# EAGLE board Swissler_HW2-2 (EAGLE 8.1.0)
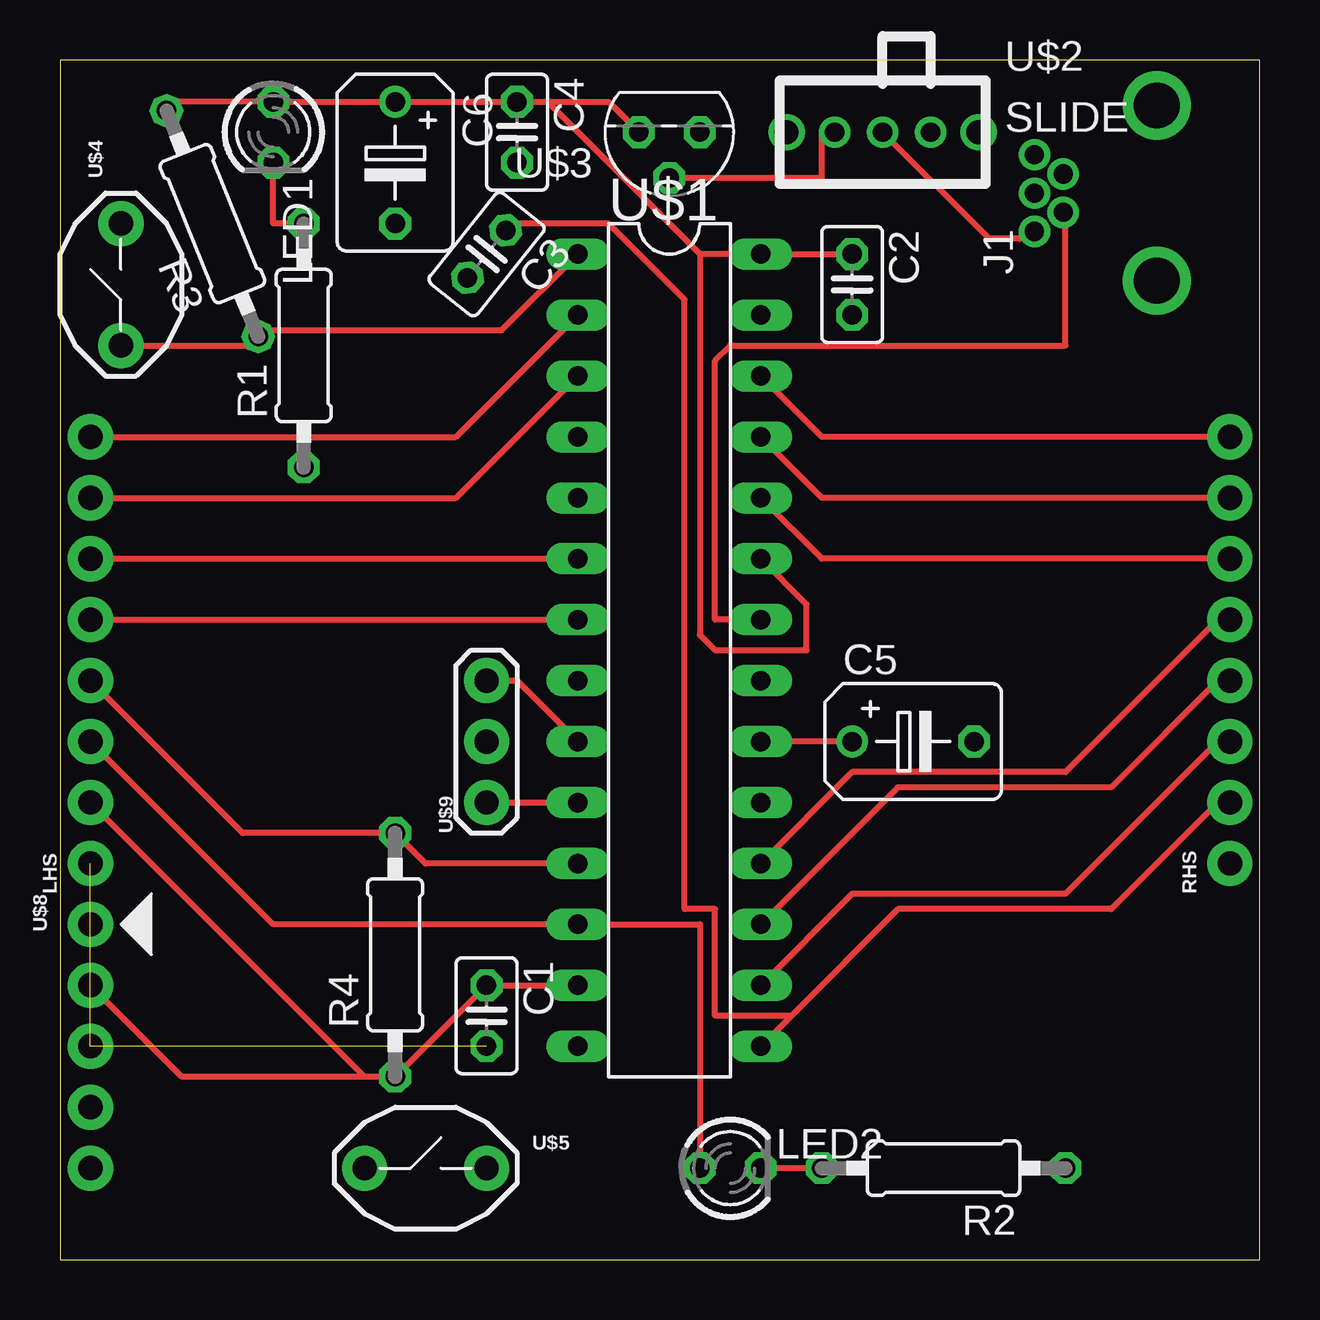
[diagram p0: board, top side]
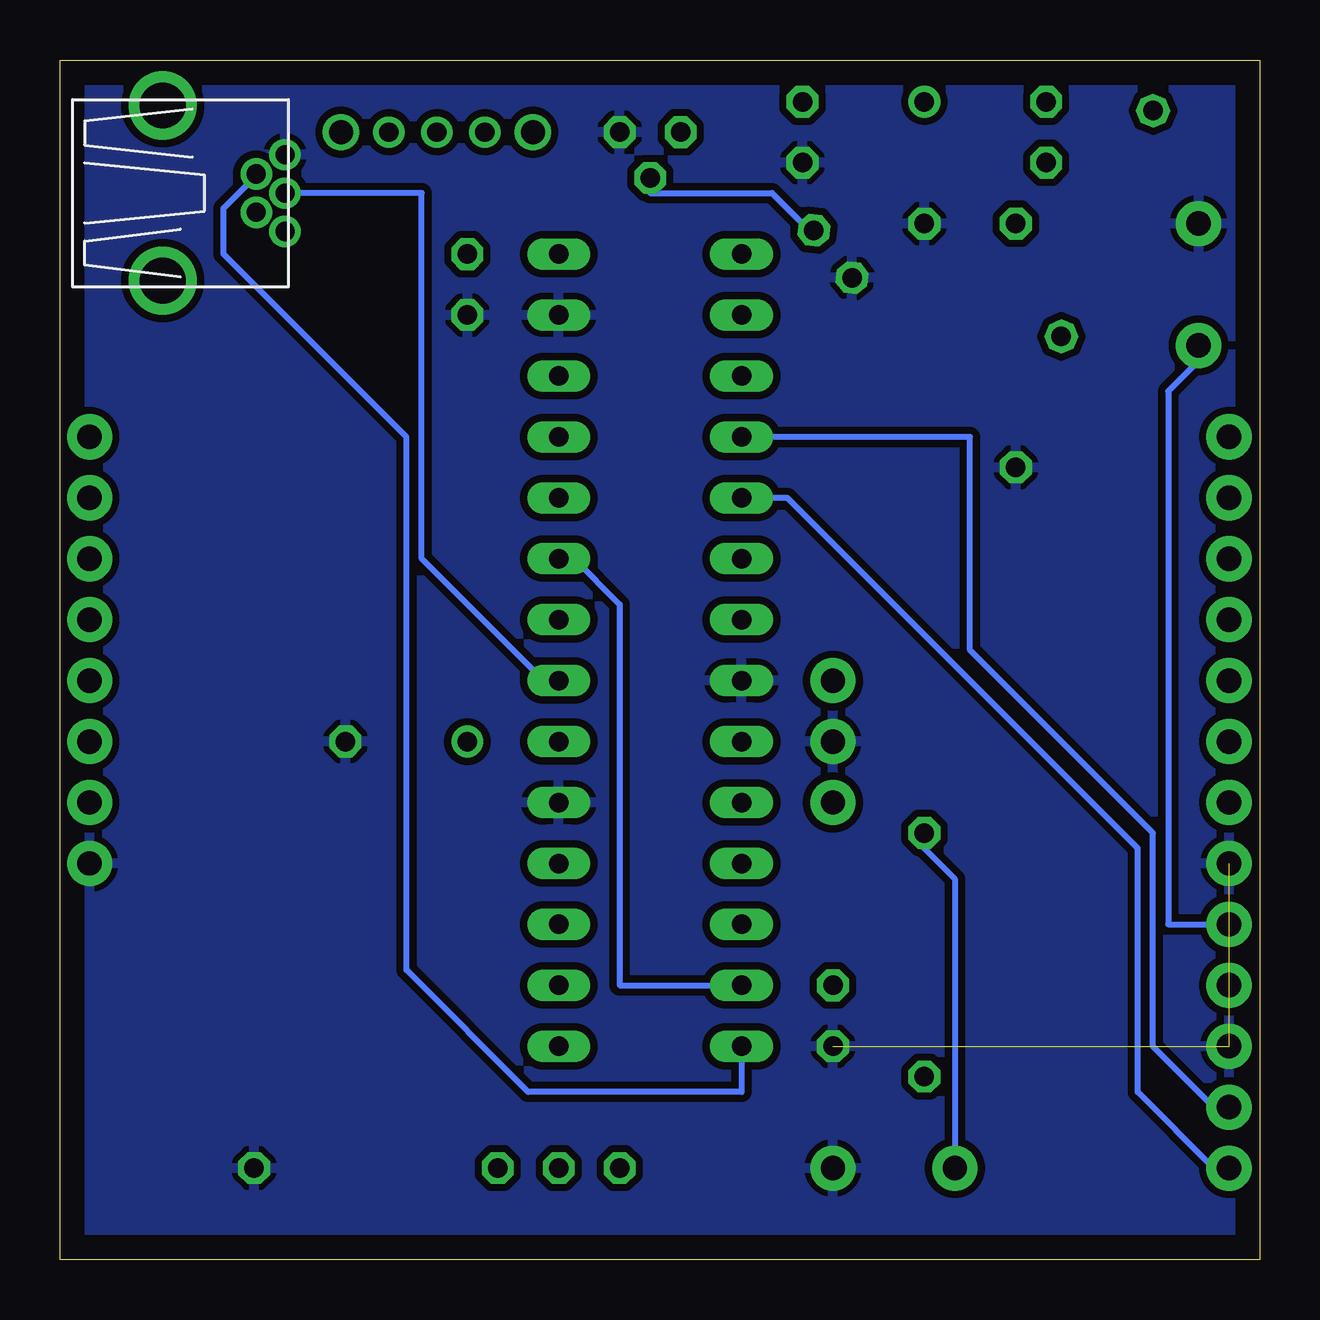
[diagram p1: board, bottom side, seen from below]

Size 50 x 50 mm. Coordinates in mm from the lower left corner, seen from the top.
Outline: 0,0 50,0 50,50 0,50 0,0
Copper layers (1*16): Top 0.035mm / dielectric 1.5mm / Bottom 0.035mm
Design rules "default": minimum track width 10mil, minimum drill 24mil, track to track 8mil, track to pad 8mil, pad to pad 8mil, via to via 8mil, smd to smd 8mil, copper to edge 40mil, drill to drill 8mil, minimum pad ring 10mil, minimum via ring 8mil, stop-mask expansion 4mil, vias tented up to drill 0mil, thermal gap 10mil

## Footprints (pad centres in the part's own frame; a part is rotated, then mirrored left to right if it is on the bottom)
C025-025X050 = drill 0.813 octagon: 1 -1.27,0; 2 1.27,0
B45181B = drill 0.813: + -2.54,0 | drill 0.813 octagon: - 2.54,0
USB-MB-H = drill 0.8: D+ 5.1,0; D- 3.9,0.8; GND 5.1,-1.6; ID 3.9,-0.8; VBUS 5.1,1.6 | drill 1.9: P$6 0,-3.65; P$7 0,3.65
LED3MM = drill 0.813 octagon: A -1.27,0; K 1.27,0
1X08 = drill 1.016 pad 1.88: 1 0,0; 2 2.54,0; 3 5.08,0; 4 7.62,0; 5 10.16,0; 6 12.7,0; 7 15.24,0; 8 17.78,0
0207/10 = drill 0.813 octagon: 1 -5.08,0; 2 5.08,0
DIL28-3 = drill 0.813 long: 1 -16.51,-3.81; 2 -13.97,-3.81; 3 -11.43,-3.81; 4 -8.89,-3.81; 5 -6.35,-3.81; 6 -3.81,-3.81; 7 -1.27,-3.81; 8 1.27,-3.81; 9 3.81,-3.81; 10 6.35,-3.81; 11 8.89,-3.81; 12 11.43,-3.81; 13 13.97,-3.81; 14 16.51,-3.81; 15 16.51,3.81; 16 13.97,3.81; 17 11.43,3.81; 18 8.89,3.81; 19 6.35,3.81; 20 3.81,3.81; 21 1.27,3.81; 22 -1.27,3.81; 23 -3.81,3.81; 24 -6.35,3.81; 25 -8.89,3.81; 26 -11.43,3.81; 27 -13.97,3.81; 28 -16.51,3.81
SLIDE = drill 0.8: 1 -2,0; 2 0,0; 3 2,0 | drill 1: P$1 -4,0; P$2 4,0
TO92 = drill 0.813 octagon: 1 -1.27,0; 2 0,1.905; 3 1.27,0
PB = drill 1.016 pad 1.88: 1 -2.54,0; 2 2.54,0
1X05 = drill 1.016 pad 1.88: 1 0,0; 2 2.54,0; 3 5.08,0; 4 7.62,0; 5 10.16,0
OSC = drill 1.016 pad 1.88: 1 -2.54,0; 2 0,0; 3 2.54,0

## Placement (x,y rotation side)
C1  0.1uF  [C025-025X050]  17.78,10.16 270 top
C2  0.1uF  [C025-025X050]  33.02,40.64 270 top
C3  0.1uF  [C025-025X050]  17.78,41.91 231.3 top
C4  0.1uF  [C025-025X050]  19.05,46.99 270 top
C5  10uF  [B45181B]  35.56,21.59 0 top
C6  10uF  [B45181B]  13.97,45.72 270 top
J1  USB-MB-H  [USB-MB-H]  45.72,44.45 180 top
LED1  RED  [LED3MM]  8.89,46.99 270 top
LED2  GREEN  [LED3MM]  27.94,3.81 0 top
LHS  CONN_08  [1X08]  1.27,16.51 90 top
R1  330  [0207/10]  10.16,38.1 90 top
R2  330  [0207/10]  36.83,3.81 180 top
R3  10k  [0207/10]  6.35,43.18 112.1 top
R4  10k  [0207/10]  13.97,12.7 90 top
RHS  CONN_08  [1X08]  48.77,16.51 90 top
U$1  PIC32MX250F128B  [DIL28-3]  25.4,25.4 270 top
U$2  SLIDE  [SLIDE]  34.29,46.99 0 top
U$3  MMCP1702  [TO92]  25.4,46.99 180 top
U$4  RESET  [PB]  2.54,40.64 90 top
U$5  USER  [PB]  15.24,3.81 0 top
U$8  PICKIT3  [1X05]  1.27,13.97 270 top
U$9  OSC  [OSC]  17.78,21.59 90 top

## Library data of the parts
C1-C6 J1 LHS R1-R4 RHS U$1-U$5 U$8 U$9 = Swissler_HW2
LED1 LED2 = led

## Nets
+3V3: C1.1 C2.1 C4.1 C6.+ LED1.A LHS.2 R3.2 R4.1 U$1.13 U$1.23 U$1.28 U$3.3 U$8.2
+5V: C3.1 RHS.2 U$1.15 U$2.1 U$3.2
A0: LHS.8 U$1.2
A1: LHS.7 U$1.3
A4/LED: LED2.A LHS.3 U$1.12
B2: LHS.6 U$1.6
B3: LHS.5 U$1.7
B4/USER: LHS.4 R4.2 U$1.11 U$5.1
B7: RHS.3 U$1.16
B8: RHS.4 U$1.17
B9: RHS.5 U$1.18
B13: RHS.6 U$1.24
B14: RHS.7 U$1.25
B15: RHS.8 U$1.26
D+: J1.D+ U$1.21
D-: J1.D- U$1.22
GND: C1.2 C2.2 C3.2 C4.2 C5.- C6.- J1.GND LHS.1 R1.1 R2.1 RHS.1 U$1.8 U$1.19 U$1.27 U$3.1 U$4.2 U$5.2 U$8.3 U$9.2
MCLR: R3.1 U$1.1 U$4.1 U$8.1
N$2: U$1.9 U$9.3
N$3: U$1.10 U$9.1
N$4: LED2.K R2.2
N$5: LED1.K R1.2
PGC: U$1.5 U$8.5
PGD: U$1.4 U$8.4
USBID: J1.ID U$1.14
VBUS: J1.VBUS U$2.2
VCAP: C5.+ U$1.20

## Tracks (layer width: path | path; a pad name or v marks a point on that pad's centre or on a via)
+3V3
  Top 0.254: U$1.13 C1.1 R4.1 12.7,7.62 | U$8.2 5.08,7.62 12.7,7.62 | 12.7,7.62 LHS.2 | U$1.23 31.11,27.3 31.11,25.4 27.3,25.4 26.67,26.04 26.67,41.91 | 26.67,41.91 U$1.28 C2.1 | R3.2 4.45,48.26 LED1.A C6.+ C4.1 20.32,48.26 | U$3.3 22.86,48.26 20.32,48.26 | 20.32,48.26 26.67,41.91
  Bottom 0.254: U$1.13 26.67,11.43 26.67,27.3 28.57,29.21 U$1.23
+5V
  Top 0.254: U$3.2 31.75,45.09 31.75,46.99 U$2.1 | 30.48,10.16 34.92,14.61 43.81,14.61 48.26,19.05 RHS.2 | 30.48,10.16 U$1.15 | 30.48,10.16 27.3,10.16 27.3,14.61 26.04,14.61 26.04,40.01 22.86,43.18 19.05,43.18 C3.1
  Bottom 0.254: U$3.2 25.4,44.45 20.32,44.45 19.05,43.18 C3.1
A0
  Top 0.254: U$1.2 16.51,34.29 LHS.8
A1
  Top 0.254: U$1.3 16.51,31.75 LHS.7
A4/LED
  Top 0.254: LED2.A 26.67,13.97 U$1.12 8.89,13.97 LHS.3
B2
  Top 0.254: LHS.6 U$1.6
B3
  Top 0.254: LHS.5 U$1.7
B4/USER
  Top 0.254: U$1.11 15.24,16.51 R4.2 7.62,17.78 LHS.4
  Bottom 0.254: U$5.1 12.7,15.88 13.97,17.14 R4.2
B7
  Top 0.254: U$1.16 33.02,15.24 41.91,15.24 48.26,21.59 RHS.3
B8
  Top 0.254: U$1.17 34.92,19.68 43.81,19.68 48.26,24.13 RHS.4
B9
  Top 0.254: U$1.18 33.02,20.32 41.91,20.32 48.26,26.67 RHS.5
B13
  Top 0.254: U$1.24 31.75,29.21 RHS.6
B14
  Top 0.254: U$1.25 31.75,31.75 RHS.7
B15
  Top 0.254: U$1.26 31.75,34.29 RHS.8
D+
  Bottom 0.254: J1.D+ 34.92,44.45 34.92,29.21 29.84,24.13 U$1.21
D-
  Top 0.254: U$1.22 27.3,26.67 27.3,37.47 27.94,38.1 41.91,38.1 41.91,43.18 J1.D-
GND  (2 unrouted)
  pour Bottom (isolate 0.305): 0,50.8 -2.54,50.8 -2.54,-2.54 50.8,-2.54 50.8,50.8
MCLR
  Top 0.254: U$4.1 8.26,38.1 R3.1 8.26,38.73 18.41,38.73 U$1.1
  Top 0.406: 7.89,38.1 R3.1
  Bottom 0.254: U$8.1 3.81,13.97 3.81,36.2 2.54,37.47 U$4.1
N$2
  Top 0.254: U$1.9 19.05,24.13 U$9.3
N$3
  Top 0.254: U$9.1 U$1.10
N$4
  Top 0.254: R2.2 LED2.K
N$5
  Top 0.254: LED1.K 8.89,43.18 R1.2
PGC
  Bottom 0.254: U$1.5 19.68,31.75 5.08,17.14 5.08,6.99 1.91,3.81 U$8.5
PGD
  Bottom 0.254: U$1.4 12.06,34.29 12.06,25.4 4.45,17.78 4.45,8.89 1.91,6.35 U$8.4
USBID
  Bottom 0.254: U$1.14 21.59,6.99 30.48,6.99 35.56,12.06 35.56,34.29 43.18,41.91 43.18,43.81 41.91,45.09 J1.ID
VBUS
  Top 0.254: U$2.2 38.73,42.55 40.01,42.55 J1.VBUS
VCAP
  Top 0.254: C5.+ U$1.20